# Altium PCB PCB_P1.5_Nuvoton_290321.PcbDoc
Units mm, origin at the board's own origin, x right, y up, seen from the top; angles counter-clockwise.
Board outline 61.77 x 36.04 mm, 2 copper layers (Top Layer, Bottom Layer); 42 components, 34 nets, 179 pads, 52 vias.
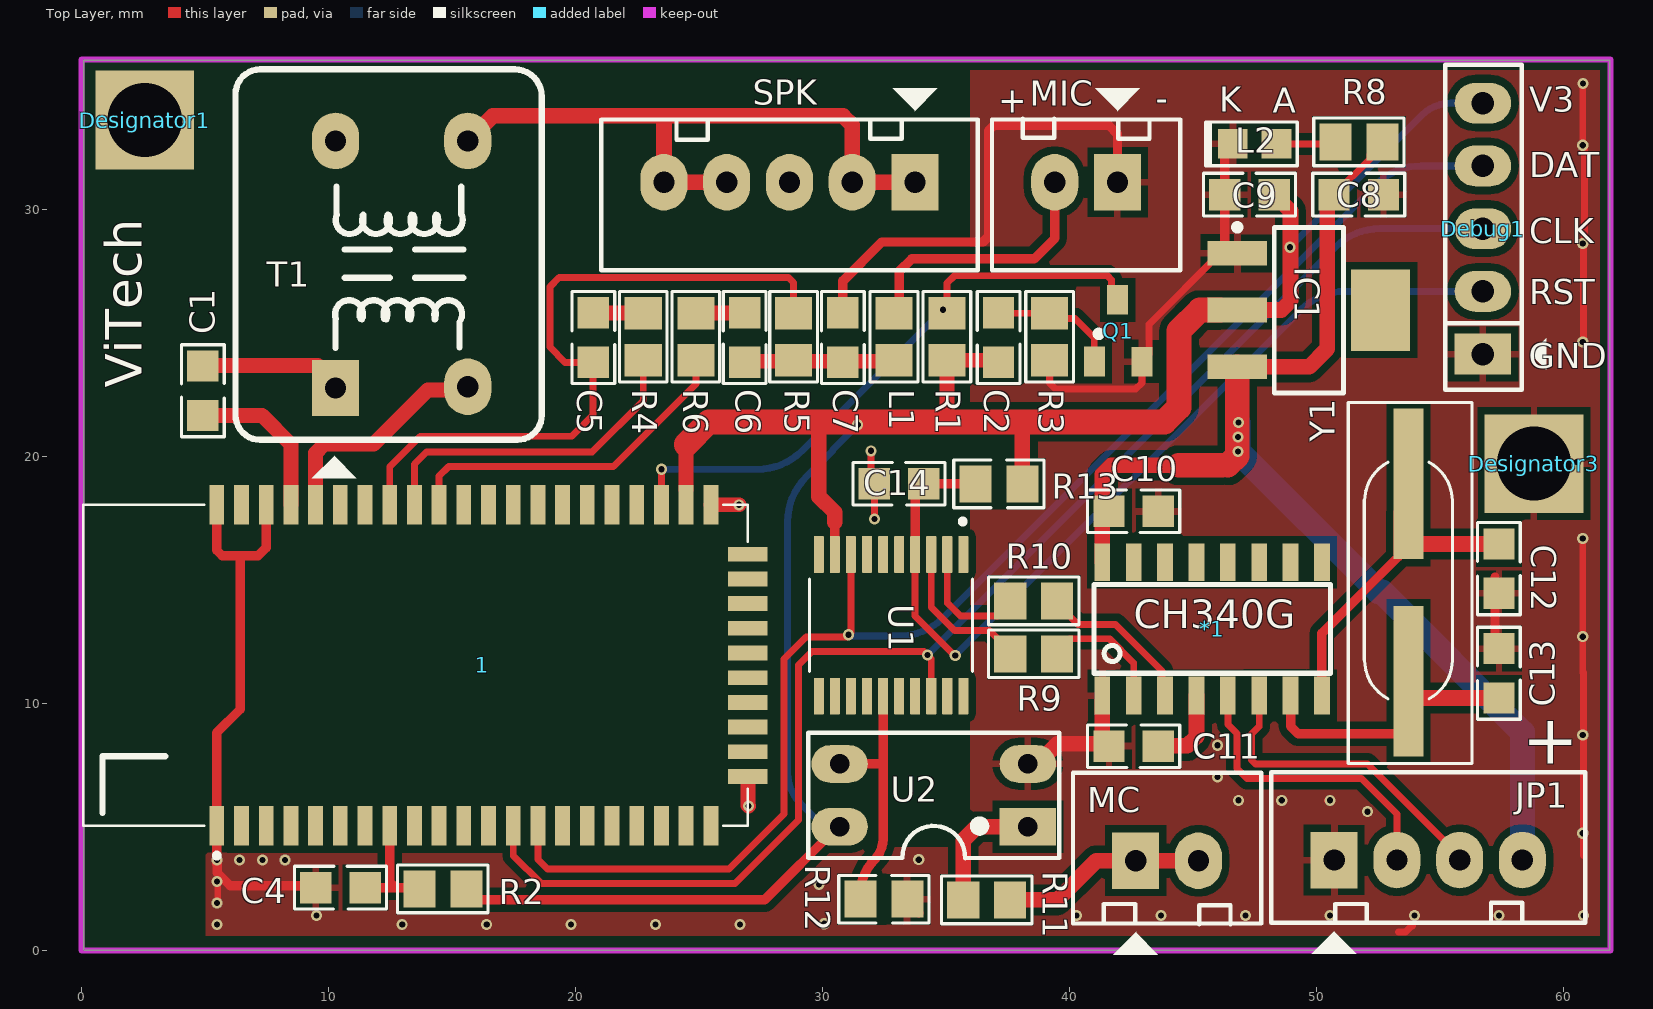
[diagram p0: Top Layer view]
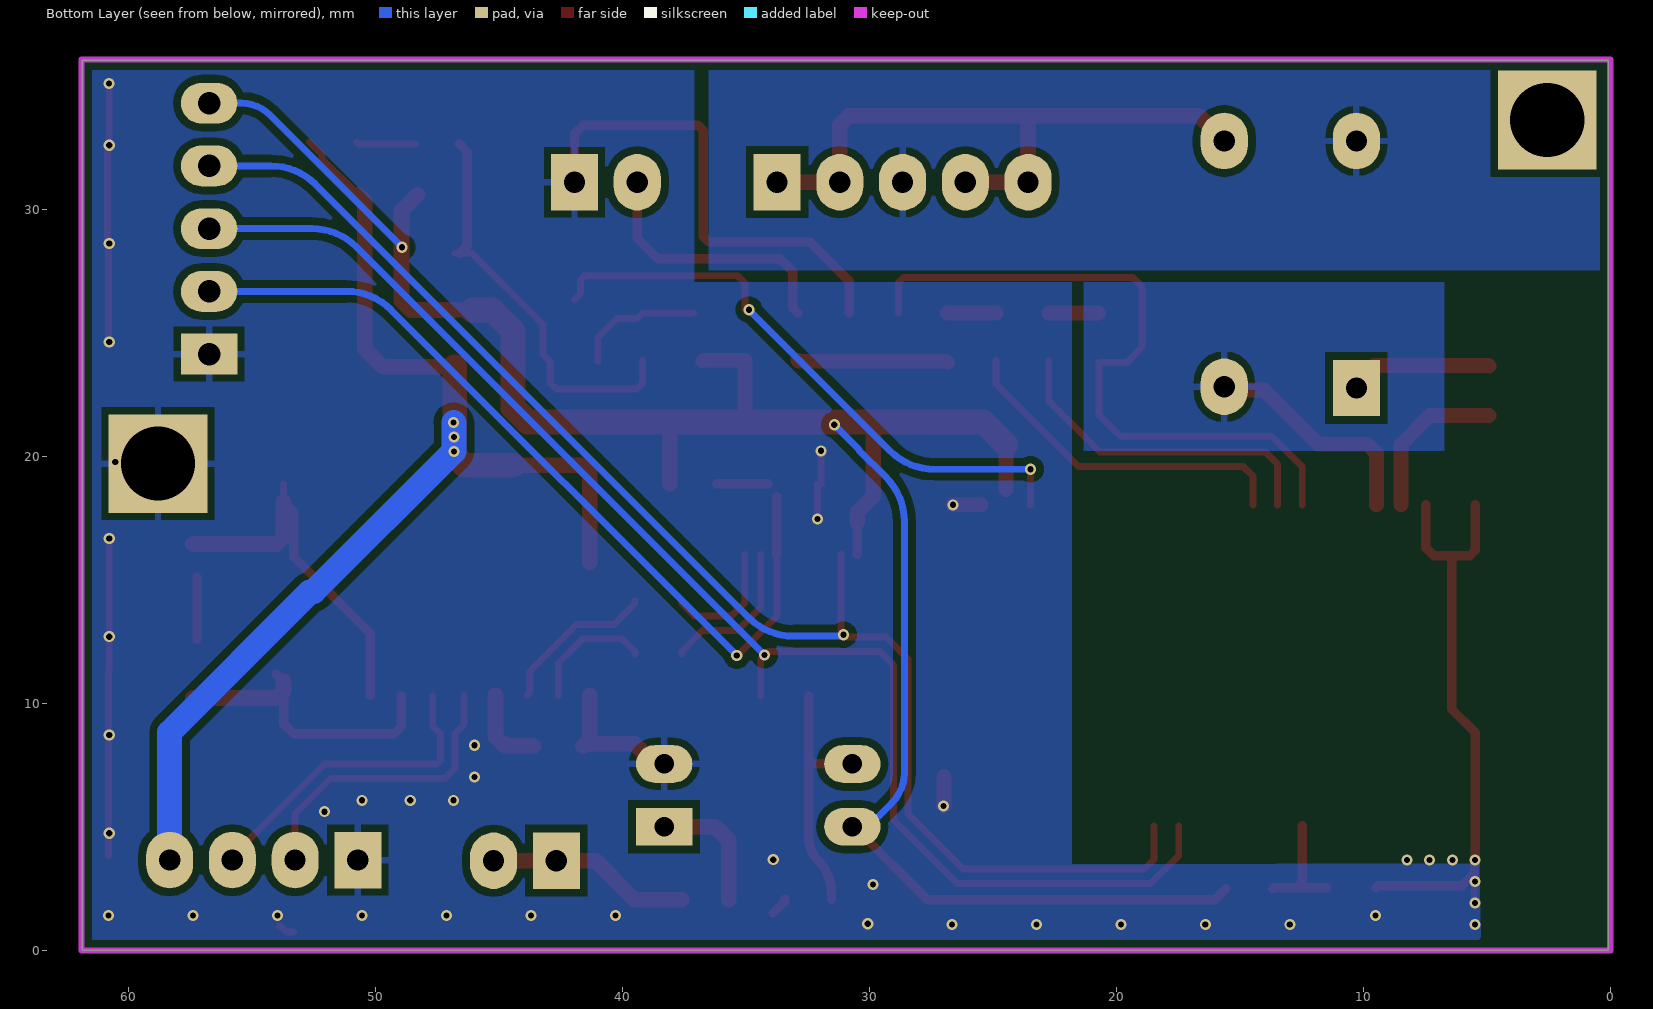
[diagram p1: Bottom Layer view, seen from below]
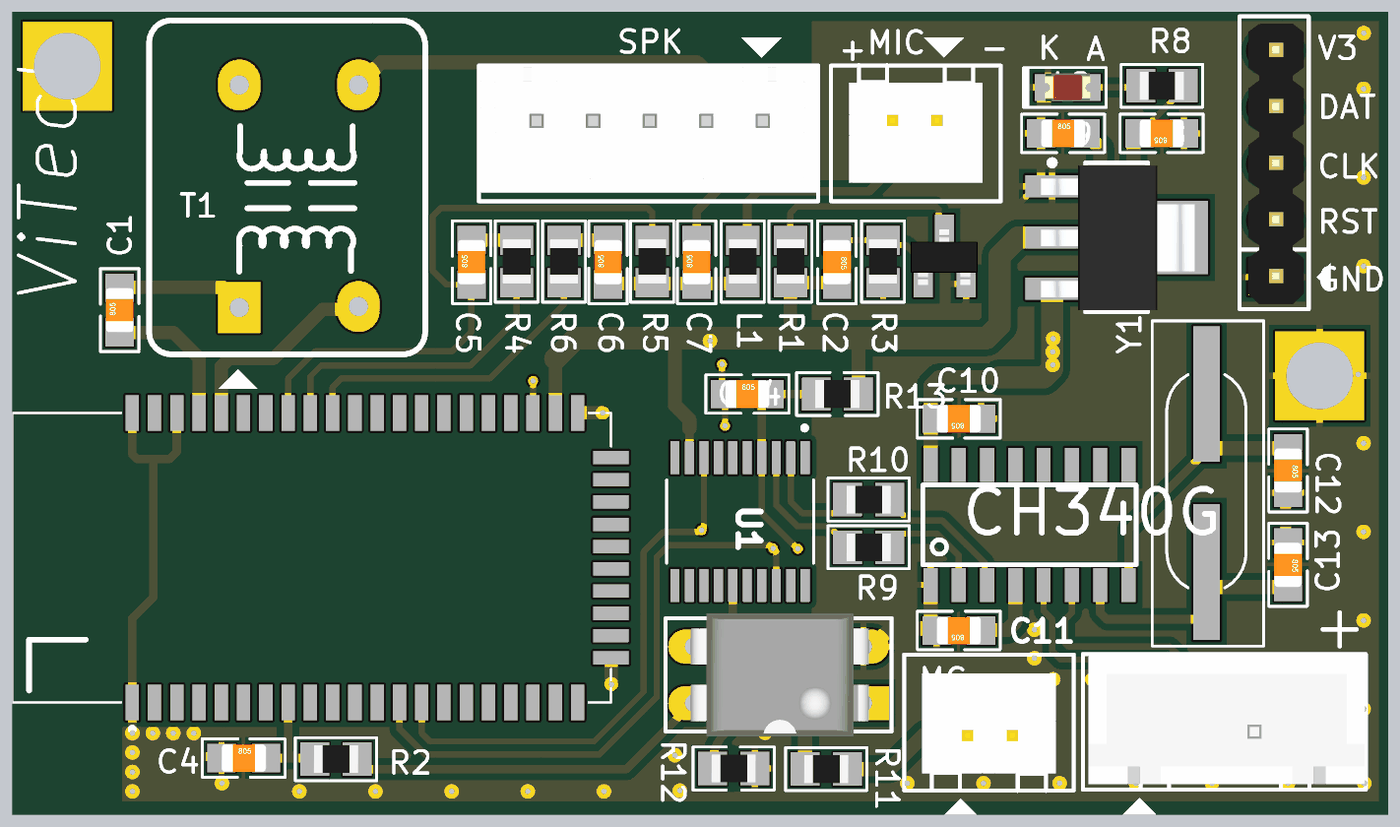
[diagram p2: 3D render of the assembled board from above, using the file's embedded part models]

## Layer stack, top to bottom
Top Solder: solder mask 0.0102, Solder Resist, Dk 3.5
Top Layer: signal copper 0.0356
Dielectric 1: dielectric 0.32, FR-4, Dk 4.8
Bottom Layer: signal copper 0.0356
Bottom Solder: solder mask 0.0102, Solder Resist, Dk 3.5

## Board outline
0.098,0.013 61.873,0.013 61.873,36.05 0.098,36.05

## Design rules (kind name [scope] priority, off if disabled: settings)
Clearance [All] p1: gap=0.305 ignorepadtopadclearanceinfootprint=FALSE
PlaneConnect PlaneConnect_1 [All] p1: planeconnectstyle=Relief reliefexpansion=0.508 reliefentries=4 reliefconductorwidth=0.254 reliefairgap=0.254
PolygonConnect vias_connect [IsNamedPolygon('GND_BT_L01_P001') vs Isvia] p1: connectstyle=Direct reliefconductorwidth=0.254 reliefentries=4 polygonreliefangle="90 Angle" airgapwidth=0.254
PolygonConnect vias_connect_1 [IsNamedPolygon('GND_BT_L02_P000') vs Isvia] p2: connectstyle=Direct reliefconductorwidth=0.254 reliefentries=4 polygonreliefangle="90 Angle" airgapwidth=0.254
PolygonConnect Pad_connect [All] p3: connectstyle=Relief reliefconductorwidth=0.279 reliefentries=4 polygonreliefangle="90 Angle" airgapwidth=0.279
RoutingVias [All] p1: holewidth=0.25 width=0.45 viastyle="Through Hole" minholewidth=0.25 minwidth=0.45 maxholewidth=0.25 maxwidth=0.45
SolderMaskExpansion [All] p1: expansion=0.102 istentingtop=FALSE
Width Width_1 [All] p1: maxlimit=0.635 minlimit=0.279 preferedwidth=0.381
29 further rules are at their usual default settings.

## Classes and differential pairs
net class Undefined: 3V3 CLK DAT GND_BT RX0 RX_PL

## Components (designator, comment, footprint, x,y, rotation, side; value= is the part's Value field where it differs from the comment)
1 "FSC-BT806" FSCBT806 13.928,11.295 r90 top locked
*1 "CH340G" CH340G 45.772,13.021 r90 top
C1 "0.1µF" CAP_0805 4.916,22.663 r90 top
C2 "1uF" CAP_0805 37.125,24.814 r270 top
C4 "100nF" CAP_0805 10.489,2.548 r0 top
C5 "0.1µF" CAP_0805 20.722,24.813 r90 top
C6 "0.1µF" CAP_0805 26.845,24.813 r90 top
C7 "15pF" CAP_0805 30.823,24.813 r90 top
C8 "1uF" CAP_0805 51.707,30.603 r180 top
C9 "4.7uF" CAP_0805 47.283,30.602 r0 top
C10 "0.1uF" CAP_0805 42.597,17.783 r180 top
C11 "0.1uF" CAP_0805 42.597,8.275 r180 top
C12 "22pF" CAP_0805 57.383,15.46 r270 top
C13 "22pF" CAP_0805 57.383,11.226 r270 top
C14 "0.1uF" CAP_0805 33.1,18.894 r0 top
Debug1 "JP5" JP5 56.733,24.145 r90 top
Designator1 "Comment" VIT 2.561,33.618 r0 top
Designator3 "Comment" VIT 58.8,19.711 r0 top
IC1 "LM1117" SOT223-4N 49.686,25.929 r0 top value=LM317
JP1 "" CON4 50.712,3.663 r0 top value="Connector 4"
L1 "15nH" RES_0805 32.892,24.848 r90 top
L2 "" LED_0805 47.49,32.659 r0 top
MC "" CON2 42.678,3.637 r0 top value="Connector 2" (schematic designator MC1)
MIC "JP2" CON2 41.94,31.104 r180 top value="Connector 2" (schematic designator MIC1)
Q1 "SI2302" SOT23A 41.94,25.092 r0 top
R1 "10K" RES_0805 35.037,24.848 r90 top
R2 "10K" RES_0805 14.629,2.497 r180 top
R3 "10K" RES_0805 39.194,24.848 r270 top
R4 "1K" RES_0805 22.741,24.848 r270 top
R5 "2.2K" RES_0805 28.829,24.848 r90 top
R6 "1K" RES_0805 24.869,24.848 r270 top
R8 "1K" RES_0805 51.715,32.736 r0 top
R9 "100R" RES_0805 38.548,12.013 r0 top
R10 "100R" RES_0805 38.548,14.156 r0 top
R11 "100R" RES_0805 36.645,2.051 r0 top
R12 "100R" RES_0805 32.486,2.079 r180 top
R13 "10K" RES_0805 37.14,18.894 r180 top
SPK "JP5" CON5 33.74,31.104 r180 top value="Connector 5" (schematic designator SPK1)
T1 "T_Adio" T_Adito 11.736,27.674 r90 top value=BAX
U1 "N76E003AT20" SOP65P640X120-20N 32.775,13.169 r270 top
U2 "PC817" DIP4/W0.3 38.311,5.015 r90 top
Y1 "12MHz" XTAL_314_240X47_SMD 53.719,18.894 r270 top

## Footprints (in the part's own frame and the unit in brackets; to place one, negate y for a bottom-side part, rotate by r counter-clockwise, add the part's x,y. Pads: shape width x height; smd on the part's side, far side on the other; paste and mask are expansions set on the pad)
CAP_0805 [mm] "Ceramic Capacitor"
  rect 1.27x1.27 smd mask+0.076: 1(-1,0) 2(1,0)
  silkscreen extent -1.86,-0.86 1.86,0.86, body extent -1,-0.62 1,0.63, height 0.78
CH340G [mil]
  rect 60x25 smd: 1(-106.1,175) 2(-106.1,125) 3(-106.1,75) 4(-106.1,25) 5(-106.1,-25) 6(-106.1,-75) 7(-106.1,-125) 8(-106.1,-175) 9(106.1,-175) 10(106.1,-125) 11(106.1,-75) 12(106.1,-25) 13(106.1,25) 14(106.1,75) 15(106.1,125) 16(106.1,175)
  silkscreen extent -71,-189 71,189
CON2 [mil] "CON2"
  rect 75x90 hole 34: 1(0,0)
  oval 75x90 hole 34: 2(100,0)
  silkscreen extent -100,-150 200,140, body extent -68,-70 168,107, height 236
CON4 [mil] "B1205S"
  rect 75x90 hole 34: 1(0,0)
  oval 75x90 hole 34: 2(100,0) 3(200,0) 4(300,0)
  silkscreen extent -100,-150 400,140, body extent -90,-90 398,136, height 276
CON5 [mil] "CON5"
  rect 75x90 hole 34: 1(0,0)
  oval 75x90 hole 34: 2(100,0) 3(200,0) 4(300,0) 5(400,0)
  silkscreen extent -100,-150 500,140, body extent -101,-98 496,125, height 288
DIP4/W0.3 [mil] "4 PIN, W 300mil, Pin to pin 100mil"
  rect 60x90 hole 31: 1(0,0)
  oval 60x90 hole 31: 2(100,0) 3(100,300) 4(0,300)
  silkscreen extent -50,-50 150,350, body extent -59,-10 159,305, height 170
FSCBT806 [mm]
  rect 1.6x0.6 smd: 1(-6.25,8.45) 2(-6.25,7.45) 3(-6.25,6.45) 4(-6.25,5.45) 5(-6.25,4.45) 6(-6.25,3.45) 7(-6.25,2.45) 8(-6.25,1.45) 9(-6.25,0.45) 10(-6.25,-0.55) 11(-6.25,-1.55) 12(-6.25,-2.55) 13(-6.25,-3.55) 14(-6.25,-4.55) 15(-6.25,-5.55) 16(-6.25,-6.55) 17(-6.25,-7.55) 18(-6.25,-8.55) 19(-6.25,-9.55) 20(-6.25,-10.55) 21(-6.25,-11.55) 32(6.75,-11.55) 33(6.75,-10.55) 34(6.75,-9.55) 35(6.75,-8.55) 36(6.75,-7.55) 37(6.75,-6.55) 38(6.75,-5.55) 39(6.75,-4.55) 40(6.75,-3.55) 41(6.75,-2.55) 42(6.75,-1.55) 43(6.75,-0.55) 44(6.75,0.45) 45(6.75,1.45) 46(6.75,2.45) 47(6.75,3.45) 48(6.75,4.45) 49(6.75,5.45) 50(6.75,6.45) 51(6.75,7.45) 52(6.75,8.45)
  rect 0.6x1.6 smd: 22(-4.25,-13.05) 23(-3.25,-13.05) 24(-2.25,-13.05) 25(-1.25,-13.05) 26(-0.25,-13.05) 27(0.75,-13.05) 28(1.75,-13.05) 29(2.75,-13.05) 30(3.75,-13.05) 31(4.75,-13.05)
  silkscreen extent -7.55,-13.05 6.75,13.85, body extent -6.22,-13.08 6.73,13.84, height 0.25
JP5 [mil] "JP5"
  rect 65x90 hole 36: 1(0,0)
  oval 65x90 hole 36: 2(100,0) 3(200,0) 4(300,0) 5(400,0)
  silkscreen extent -57,-101 461,60, body extent -48,-53 448,45, height 323
LED_0805 [mm] "LED"
  rect 1.2x1.2 smd mask+0.076: A(0.889,0) K(-0.889,0)
  silkscreen extent -1.99,-0.89 1.73,0.89, body extent -1.01,-0.62 1.01,0.63, height 1.1
RES_0805 [mm] "Resister"
  rect 1.3x1.5 smd mask+0.076: 1(0.95,0) 2(-0.95,0)
  silkscreen extent -1.83,-0.97 1.83,0.97, body extent -1,-0.63 1,0.62, height 0.5
SOP65P640X120-20N [mm]
  rrect10% 1.48x0.41 smd: 1(-2.865,2.925) 2(-2.865,2.275) 3(-2.865,1.625) 4(-2.865,0.975) 5(-2.865,0.325) 6(-2.865,-0.325) 7(-2.865,-0.975) 8(-2.865,-1.625) 9(-2.865,-2.275) 10(-2.865,-2.925) 11(2.865,-2.925) 12(2.865,-2.275) 13(2.865,-1.625) 14(2.865,-0.975) 15(2.865,-0.325) 16(2.865,0.325) 17(2.865,0.975) 18(2.865,1.625) 19(2.865,2.275) 20(2.865,2.925)
  silkscreen extent -4.3,-3.3 1.87,3.3
SOT23A [mm] "SOT 23A"
  rect 0.85x1.2 smd: 1(-0.94,-1.245) 2(0.005,1.25) 3(0.985,-1.25)
  silkscreen extent -0.88,-0.25 -0.64,0, body extent -1.5,-1.3 1.5,1.2, height 1.06
SOT223-4N [mm] "SOT223, 4-Leads, Body 6.5x3.5mm, Pitch 2.3mm, Lead Span 7mm, IPC Medium Density"
  rect 2.4x1 smd: 1(-2.9,2.3) 2(-2.9,0) 3(-2.9,-2.3)
  rect 2.4x3.3 smd: 4(2.9,0)
  silkscreen extent -3.02,-3.35 1.4,3.47, body extent -3.39,-3.27 3.5,3.23, height 1.72
T_Adito [mm]
  rect 2.286x1.905 hole 0.864: 1(-4.9,1.45)
  oval 2.286x1.905 hole 0.864: 2(-4.85,-3.9) 3(5.1,-3.9) 4(5.1,1.45)
  silkscreen extent -8.56,-6.9 8,5.5
VIT [mm] "VIT"
  rect 4x4 hole 3: ""(0,0)
XTAL_314_240X47_SMD [mm] "CASE: TH"
  rect 6.096x1.2 smd: 1(0,0) 2(8,0)
  silkscreen extent -3.29,-2.44 11.32,2.57, body extent -2.99,-2.27 10.9,2.41, height 3.05

## Part data
C1 C5 C6 C7 C10 C11 C14: library part CAP_0.1uF-50V-5%-0805, "0.1µF ±5% 50V Ceramic Capacitor X7R 0805 (2012 Metric)", Case/Package="0805 (2012 Metric)", Manufacturer=KEMET, Manufacturing Part Number=C0805C104J5RACTU, Supplier Part Number-1=399-1171-1-ND, Supplier-1=Digikey
C2 C8: library part CAP_1uF-50V-5%-0805, "1µF ±5% 50V Ceramic Capacitor X7R 0805 (2012 Metric)", Case/Package="0805 (2012 Metric)", Manufacturer=Yageo, Manufacturing Part Number=CC0805JKX7R9BB105, Supplier Part Number-1=311-3498-1-ND, Supplier-1=Digikey
C4: library part CAP_1uF-50V-5%-0805, "100µF ±5% 50V Ceramic Capacitor X7R 0805 (2012 Metric)", Case/Package="0805 (2012 Metric)", Manufacturer=Yageo, Manufacturing Part Number=CC0805JKX7R9BB105, Supplier Part Number-1=311-3498-1-ND, Supplier-1=Digikey
C9: library part CAP_1uF-50V-5%-0805, "4.7µF ±5% 50V Ceramic Capacitor X7R 0805 (2012 Metric)", Case/Package="0805 (2012 Metric)", Manufacturer=Yageo, Manufacturing Part Number=CC0805JKX7R9BB105, Supplier Part Number-1=311-3498-1-ND, Supplier-1=Digikey
C12 C13: library part CAP_22pF-50V-5%-0805, "22pF ±5% 50V Ceramic Capacitor C0G, NP0 0805 (2012 Metric)", Case/Package=0805, Manufacturer=KEMET, Manufacturer Part Number=C0805C220J5GACTU, Supplier Part Number-1=399-1113-1-ND, Supplier-1=Digikey
IC1: "Available in 1.8V, 2.5V, 2.85V, 3.3V, 5V, and  Adjustable Versions"
JP1: library part Con4, "Connector 4"
L1: library part RES_1K-0.125W-1%-0805, "Conductor 15nH", Case/Package=0805, Manufacturer=垈㎵á, Manufacturer Part Number=RC0805FR-071KL, Supplier Part Number-1=311-1.00KCRCT-ND, Supplier-1=Digikey
L2: library part LED-RED_10mA-0805, "Red 621nm LED Indication - Discrete 2V 0805 (2012 Metric)", Case/ Package=0805, Manufacturer="Lite-On Inc.", Manufacturer Part Number=LTST-C170EKT, Supplier Part Number-1=160-1178-1-ND, Supplier-1=Digikey
MC MIC: library part Con2, "Connector 2"
Q1: library part DV3
R1 R2 R3 R4 R6: library part RES_10K-0.125W-1%-0805_1, "10 kOhms ±1% 0.125W, 1/8W Chip Resistor 0805 (2012 Metric) Moisture Resistant Thick Film", Case/Package=0805, Manufacturer=Yageo, Manufacturing Part Number=RC0805FR-0710KL, Supplier Part Number-1=311-10.0KCRCT-ND, Supplier-1=Digikey
R5: library part RES_10K-0.125W-1%-0805_1, "2.2kOhms ±1% 0.125W, 1/8W Chip Resistor 0805 (2012 Metric) Moisture Resistant Thick Film", Case/Package=0805, Manufacturer=Yageo, Manufacturing Part Number=RC0805FR-0710KL, Supplier Part Number-1=311-10.0KCRCT-ND, Supplier-1=Digikey
R8: library part RES_10K-0.125W-1%-0805_1, "1 kOhms ±1% 0.125W, 1/8W Chip Resistor 0805 (2012 Metric) Moisture Resistant Thick Film", Case/Package=0805, Manufacturer=Yageo, Manufacturing Part Number=RC0805FR-0710KL, Supplier Part Number-1=311-10.0KCRCT-ND, Supplier-1=Digikey
R9 R10: library part RES_0ohm-0.125W-1%-0805_1, "1000Ohms ±1% 0.125W, 1/8W Chip Resistor 0805 (2012 Metric) Moisture Resistant Thick Film", Case/Package=0805, Manufacturer=垈㎵á, Manufacturer Part Number=RC0805FR-071KL, Supplier Part Number-1=311-1.00KCRCT-ND, Supplier-1=Digikey
R11 R12: library part RES_1K-0.125W-1%-0805, "1 kOhms ±1% 0.125W, 1/8W Chip Resistor 0805 (2012 Metric) Moisture Resistant Thick Film", Case/Package=0805, Manufacturer=垈㎵á, Manufacturer Part Number=RC0805FR-071KL, Supplier Part Number-1=311-1.00KCRCT-ND, Supplier-1=Digikey
R13: library part RES_10MOHM-0.125W-1%-0805, "10K ±1% 0.125W, 1/8W Chip Resistor 0805 (2012 Metric) Automotive AEC-Q200, High Voltage Thick Film", Case/Package="0805 (2012 Metric)", Manufacturer="Rohm Semiconductor", Manufacturing Part Number=KTR10EZPF1005, Supplier Part Number-1=RHM10.0MAHCT-ND, Supplier-1=Digikey
SPK: library part Con5, "Connector 5"
T1: "Transformer Audio", Designed by=VanDungEvn
U1: "8051 N76 Microcontroller IC 8-Bit 16MHz 18KB _18K x 8_ FLASH 20-TSSOP", Package="TSSOP-20 Nuvoton Technology", Availability=Unavailable, MF="Nuvoton Technology", MP=N76E003AT20, Price=None, SnapEDA_Link=https://www.snapeda.com/parts/N76E003AT20/Nuvoton%20Technology%20Corporation%20of%20America/view-part/652314/?ref=snap
U2: "Single Opto"
Y1: library part XTAL_8MHZ-LFXTAL030234, "Crystals 8MHz 22pF -20C 70C", Case/Package=SMD, Manufacturer="IQD Frequency Products", Manufacturing Part Number=LFXTAL030234Reel, Supplier Part Number-1=449-LFXTAL030234REEL, Supplier-1=Mouser

## Via types
v1: diameter 0.45, hole 0.25, Top Layer to Bottom Layer, 52 vias

## Nets (pads, with @x,y where several pads share a name; then routed paths per layer and width w, separated by ;. In a path a pad name is that pad's centre, name@x,y a point inside that pad or via, vN(x,y) a via of type N, cw(c..) or ccw(c..) an arc to the next point about the centre after c; other vN are vias at no path point)
3V3: 1.33 C2.2 C9.2 Debug1.5 IC1.2 R1.2 R2.2 R13.2 U1.9 U2.4 | length 92.6
  Top Layer w0.381: R2.2 16.025,2.051 27.655,2.051 30.619,5.015 U2.4 ; U1.9 30.5,17.336
  Top Layer w0.6: 1.33@24.478,18.67 24.478,20.484 ; 35.05,21.401 35.037,21.414 R1.2 36.707,23.898 C2.2@36.75,23.856 ; IC1.2@46.086,25.929 IC1.2
  Top Layer w0.635: 29.85,21.401 29.85,18.382 30.5,17.732 30.5,17.336 ; R13.2 38.09,21.388 38.103,21.401 ; IC1.2 48.575,25.929 48.947,26.3 48.947,29.939 C9.2
  Top Layer w1: 24.478,20.484 25.395,21.401 29.85,21.401 35.05,21.401 38.103,21.401 43.845,21.401 44.431,21.987 44.431,25.092 45.267,25.929 IC1.2@46.086,25.929
  Bottom Layer w0.279: 29.093,5.972 29.597,5.468 ccw(c30.691,6.562) U2.4 ; 29.092,5.973 cw(c30.309,7.189) 28.589,7.189 28.589,17.371 cw(c31.129,17.371) 29.333,19.167 30.414,20.248 30.414,20.276 v1(31.422,21.284) ; v1(48.918,28.473) 54.271,33.826 cw(c55.427,32.671) 55.427,34.305 Debug1.5
CLK: 1.13 Debug1.3 U1.18 | length 57.3
  Top Layer w0.279: 1.13 17.478,3.852 18.616,2.714 26.463,2.714 29.029,5.28 29.029,11.56 29.582,12.113 34.1,12.113 v1(34.25,11.963) 34.4,11.813 U1.18
  Bottom Layer w0.279: v1(34.25,11.963) 50.768,28.481 cw(c52.564,26.685) 52.564,29.225 Debug1.3
DAT: 1.14 Debug1.4 U1.8 | length 58.2
  Top Layer w0.279: 1.14 18.478,3.678 18.858,3.298 26.221,3.298 28.444,5.522 28.444,11.802 29.34,12.697 v1@30.986,12.697 ; v1@31.15,12.861 U1.8@31.15,16.034
  Bottom Layer w0.279: v1(31.049,12.783) 31.105,12.727 33.082,12.727 ccw(c33.082,15.267) 34.878,13.471 52.428,31.021 cw(c54.224,29.225) 54.224,31.765 Debug1.4
DC_CHECK: R12.1 U1.15 U2.3 | length 10.2
  Top Layer w0.381: U2.3 32.45,7.555 ; R12.1 31.536,2.316 cw(c33.462,2.316) 32.1,3.678 ccw(c31.255,4.523) 32.45,4.523 32.45,7.555 ; U1.15 32.45,7.555
GND_BT: 1.1 1.22 1.32 1.50 1.52 *1.1 C4.1 C7.2 C8.1 C9.1 C10.1 C11.2 C12.2 C13.1 C14.1 Debug1.1 Designator3. IC1.1 JP1.1 L2.K MIC.1 Q1.3 R3.1 R12.2 U2.2 | length 98.8
  Top Layer w0.279: v1@5.487,2.043 5.515,2.071 5.515,2.548 ; v1(31.96,20.23) 31.96,18.894 C14.1 v1(32.1,17.469) ; R3.1 39.194,22.973 39.431,22.736 42.678,22.736 42.925,22.983 Q1.3 43.211,24.128 43.211,25.353 46.086,28.229 46.593,28.229 IC1.1 ; v1@48.575,6.082 v1(48.59,6.082) ; v1@50.436,6.082 v1(50.544,6.082) ; 53.31,0.752 53.596,0.752 53.84,0.996 53.886,0.996 ; Designator3.@60.529,18.832 Designator3.@60.559,18.832 ; v1(60.773,16.685) v1(60.773,12.707) 60.773,11.258 60.803,11.258 60.803,8.728 60.803,4.75 60.803,3.854 ; v1(60.78,35.104) 60.777,35.1 60.777,32.671 60.848,32.599 60.848,28.653 60.803,28.653 v1@60.803,24.642
  Top Layer w0.381: 1.52 5.478,16.206 5.701,15.983 6.424,15.983 ; 1.50 7.478,16.314 7.147,15.983 6.424,15.983 ; C4.1 9.413,2.624 6.025,2.624 5.496,3.153 5.496,3.479 5.48,3.495 5.48,5.043 1.1 5.478,8.822 6.424,9.768 6.424,15.983 ; C7.2 30.823,27.109 32.399,28.685 36.5,28.685 36.723,28.908 36.723,33.187 36.946,33.41 41.587,33.41 41.94,33.057 MIC.1 ; R12.2 33.436,1.979 R12.2@33.895,1.519 ; IC1.1@46.593,28.229 46.283,28.538 C9.1 46.283,32.341 L2.K ; C13.1@57.224,12.595 57.224,14.46 57.224,15.112
  Top Layer w0.6: 1.32 v1(26.615,18.045) ; 1.22 26.978,5.878 v1(27.001,5.855)
  Top Layer w0.635: U2.2 38.695,7.555 39.508,8.368 41.504,8.368 C11.2 41.327,8.545 *1.1
  other v1: 5.487,1.05 12.983,1.05 16.403,1.05 19.822,1.05 23.242,1.05 26.662,1.05 30.068,1.087 9.508,1.417 40.285,1.417 43.705,1.417 47.124,1.417 50.544,1.417 53.964,1.417 57.383,1.417 60.803,1.417 5.487,1.922 29.85,2.673 5.487,2.795 5.487,3.668 6.403,3.668 7.323,3.668 8.243,3.668 33.895,3.679 60.773,4.75 52.058,5.623 46.833,6.082 45.988,7.03 45.988,8.311 60.773,8.728 60.529,19.776 60.773,24.642 60.773,28.621 60.773,32.599
Net1_8: 1.8 C4.2 R2.1 | length 4.8
  Top Layer w0.381: C4.2 12.7,2.548 ; 1.8 12.478,2.77 12.7,2.548 ; R2.1 13.628,2.548 12.7,2.548
Net1_34: 1.34 Q1.2 R1.1 | length 24.2
  Top Layer w0.279: 1.34 v1(23.478,19.483) ; R1.1@35.037,25.941 35.037,27.017 35.337,27.318 41.535,27.318 41.698,27.154 41.698,26.589 Q1.2
  Bottom Layer w0.279: v1(23.478,19.483) 27.368,19.483 ccw(c27.368,22.023) 29.164,20.227 v1(34.878,25.941)
Net1_43: 1.43 R6.1 | length 14.1
  Top Layer w0.279: 1.43 14.478,19.206 14.868,19.596 21.529,19.596 24.869,22.936 R6.1
Net1_44: 1.44 R4.1 | length 13.6
  Top Layer w0.279: 1.44 13.478,19.689 13.97,20.18 20.676,20.18 22.742,22.246 R4.1
Net1_45: 1.45 C5.1 R5.1 | length 28.6
  Top Layer w0.279: 1.45 12.478,19.584 13.713,20.819 19.831,20.819 20.7,21.688 20.7,23.792 C5.1 19.579,23.814 18.966,24.427 18.966,26.873 19.34,27.247 28.618,27.247 28.829,27.036 R5.1
Net1_48: 1.48 T1.2 | length 9.4
  Top Layer w0.6: 1.48 9.478,20.145 9.829,20.496 11.821,20.496 14.018,22.693 15.505,22.693 T1.2
Net1_49: 1.49 C1.1 | length 6.5
  Top Layer w0.6: C1.1 7.311,21.663 8.478,20.496 1.49
Net*1_2: *1.2 R9.1 | length 5.1
  Top Layer w0.279: R9.1 39.498,12.113 40.008,12.623 41.623,12.623 42.597,11.649 *1.2
Net*1_3: *1.3 R10.1 | length 6.5
  Top Layer w0.279: R10.1 39.498,14.056 40.347,13.208 41.865,13.208 43.75,11.322 43.75,10.443 *1.3
Net*1_4: *1.4 C11.1 | length 3.4
  Top Layer w0.635: C11.1 43.617,8.295 44.765,8.295 45.137,8.667 *1.4
Net*1_5: *1.5 JP1.2 | length 12.2
  Top Layer w0.279: *1.5 46.407,9.157 46.786,8.778 46.786,7.368 47.183,6.971 51.816,6.971 53.252,5.535 JP1.2
Net*1_6: *1.6 JP1.3 | length 12.9
  Top Layer w0.279: *1.6 47.677,9.07 47.37,8.763 47.37,7.719 47.534,7.555 52.058,7.555 55.792,3.821 JP1.3
Net*1_7: *1.7 C13.2 Y1.2 | length 12.2
  Top Layer w0.381: *1.7 48.947,9.082 49.251,8.778 53.31,8.778 53.719,9.188 Y1.2@53.719,10.508 ; Y1.2 Y1.2@54.019,11.194
  Top Layer w0.635: Y1.2 53.719,10.508 54.001,10.226 C13.2
Net*1_8: *1.8 C12.1 Y1.1 | length 15.2
  Top Layer w0.279: Y1.1@53.719,18.171 Y1.1
  Top Layer w0.381: *1.8 50.217,12.847 53.31,15.94 53.31,17.762 Y1.1@53.719,18.171
  Top Layer w0.635: Y1.1@53.719,18.171 53.719,16.742 54.001,16.46 C12.1
NetC1_2: C1.2 T1.1 | length 5.9
  Top Layer w0.6: C1.2 4.938,23.685 9.566,23.685 10.286,22.965 T1.1
NetC2_1: C2.1 Q1.1 R3.2 | length 5.2
  Top Layer w0.279: C2.1 37.14,25.798 R3.2 39.411,25.581 40.216,25.581 41,24.797 Q1.1
NetC5_2: C5.2 R4.2 | length 2
  Top Layer w0.6: C5.2 20.73,25.806 22.734,25.806 R4.2
NetC6_1: C6.1 C7.1 L1.2 R5.2 | length 6.1
  Top Layer w0.6: C6.1 26.887,23.856 32.85,23.856 L1.2
NetC6_2: C6.2 R6.2 | length 2
  Top Layer w0.6: R6.2 24.877,25.806 26.837,25.806 C6.2
NetL1_1: L1.1 MIC.2 | length 10.9
  Top Layer w0.381: L1.1 33.099,26.005 33.099,27.489 33.609,27.999 38.567,27.999 39.4,28.832 MIC.2
NetL2_A: L2.A R8.2 | length 2.4
  Top Layer w0.279: L2.A 50.689,32.659 R8.2
NetMC1_1: MC.1 MC.2 R11.1 | length 8.3
  Top Layer w0.635: R11.1 39.499,2.051 41.085,3.637 MC.2
NetR11_2: R11.2 U2.1 | length 5.3
  Top Layer w0.635: R11.2 35.695,4.467 36.243,5.015 U2.1
NetSPK1_1: SPK.1 SPK.2 SPK.4 SPK.5 T1.3 | length 26.6
  Top Layer w0.6: SPK.1@33.459,31.384 SPK.1
  Top Layer w0.635: T1.3 16.652,33.79 23.58,33.79 ; SPK.4 SPK.5 23.58,33.79 ; SPK.1 SPK.2 31.2,33.418 30.828,33.79 23.58,33.79
NetSPK1_3: SPK.3 T1.4 | length 0.1
  Top Layer w0.6: T1.4@10.286,32.672 T1.4
NRST: C14.2 Debug1.2 R13.1 U1.4 | length 36.6
  Top Layer w0.279: U1.4 33.75,13.545 35.349,11.946 v1(35.37,11.946)
  Top Layer w0.381: U1.4 C14.2@33.75,18.382 ; C14.2 R13.1
  Bottom Layer w0.279: v1(35.37,11.946) 49.365,25.941 cw(c51.161,24.145) 51.161,26.685 Debug1.2
RX0: R9.2 U1.3 | length 6.2
  Top Layer w0.279: U1.3 34.4,13.899 35.337,12.962 36.75,12.962 37.598,12.113 R9.2
RX_PL: R10.2 U1.2 | length 5
  Top Layer w0.279: U1.2 35.05,14.075 35.579,13.546 37.088,13.546 37.598,14.056 R10.2
VCC: *1.16 C8.2 C10.2 IC1.3 JP1.4 R8.1 | length 48.5
  Top Layer w0.279: C8.2 52.155,32.05 52.155,32.225 R8.1
  Top Layer w0.635: *1.16 41.327,19.272 41.699,19.644 44.431,19.644 ; IC1.3 49.704,23.629 50.436,24.361 50.436,30.332 C8.2
  Top Layer w1: 44.431,19.644 46.168,19.644 ; 46.407,19.644 46.786,20.023 46.786,20.203 IC1.3
  Bottom Layer w1: v1(46.815,20.203) v1(46.815,20.786) 46.815,21.361 v1(46.833,21.379) ; v1@46.826,20.203 52.509,14.52 52.649,14.52 58.332,8.837 JP1.4
pads on no net: 1.2 1.3 1.4 1.5 1.6 1.7 1.9 1.10 1.11 1.12 1.15 1.16 1.17 1.18 1.19 1.20 1.21 1.23 1.24 1.25 1.26 1.27 1.28 1.29 1.30 1.31 1.35 1.36 1.37 1.38 1.39 1.40 1.41 1.42 1.46 1.47 1.51 *1.9 *1.10 *1.11 *1.12 *1.13 *1.14 *1.15 Designator1. IC1.4 U1.1 U1.5 U1.6 U1.7 U1.10 U1.11 U1.12 U1.13 U1.14 U1.16 U1.17 U1.19 U1.20

## Polygon pours and split planes (outlines as drawn)
GND_BT on Bottom Layer "GND_BT_L02_P000" (solid, pour order 0): 37.095,36.05 37.095,27.05 21.812,27.05 21.812,3.502 5.319,3.525 5.243,0.081 61.834,0.081 61.834,36.05
NetSPK1_3 on Bottom Layer "NETSPK1_3_L02_P004" (solid, pour order 4): 0.155,35.852 0.155,27.541 36.5,27.541 36.5,35.852
Net1_48 on Bottom Layer "NET1_48_L02_P005" (solid, pour order 5): 6.738,27.05 6.738,20.241 21.33,20.241 21.33,27.05
GND_BT on Top Layer "GND_BT_L01_P001" (solid, pour order 1): 35.982,36.05 35.982,31.116 35.982,4.192 5.023,4.192 5.033,0.594 62.116,0.594 61.883,36.05

## Keep-outs
Keep-Out Layer:
  lines w0.254: 0,0 61.899,0 61.899,36.073 0,36.073 0,0

## Silkscreen, mask and mechanical layers (free items; w line width, h text height)
Top Overlay:
  text "-" at 43.483,33.998 h1
  text "V3" at 58.61,33.951 h1
  text "+" at 37.113,33.917 h1
  text "DAT" at 58.61,31.309 h1
  text "CLK" at 58.61,28.641 h1
  text "RST" at 58.61,26.158 h1
  text "GND" at 58.599,23.575 h1
  text "ViTech" at 2.921,22.789 h2.54 r90
  text "+" at 58.332,7.555 h2

## Dimensions
-0.756,36.044 to -1.647,0.087 on Top Overlay
-0.138,37.001 to 61.761,36.699 on Top Overlay

## Text inside footprints (layer, text, board x,y; h text height)
L2: Top Overlay "K" at 46.06,33.959 h1; Top Overlay "A" at 48.22,33.919 h1